# EAGLE board HRM (EAGLE 7.0.0)
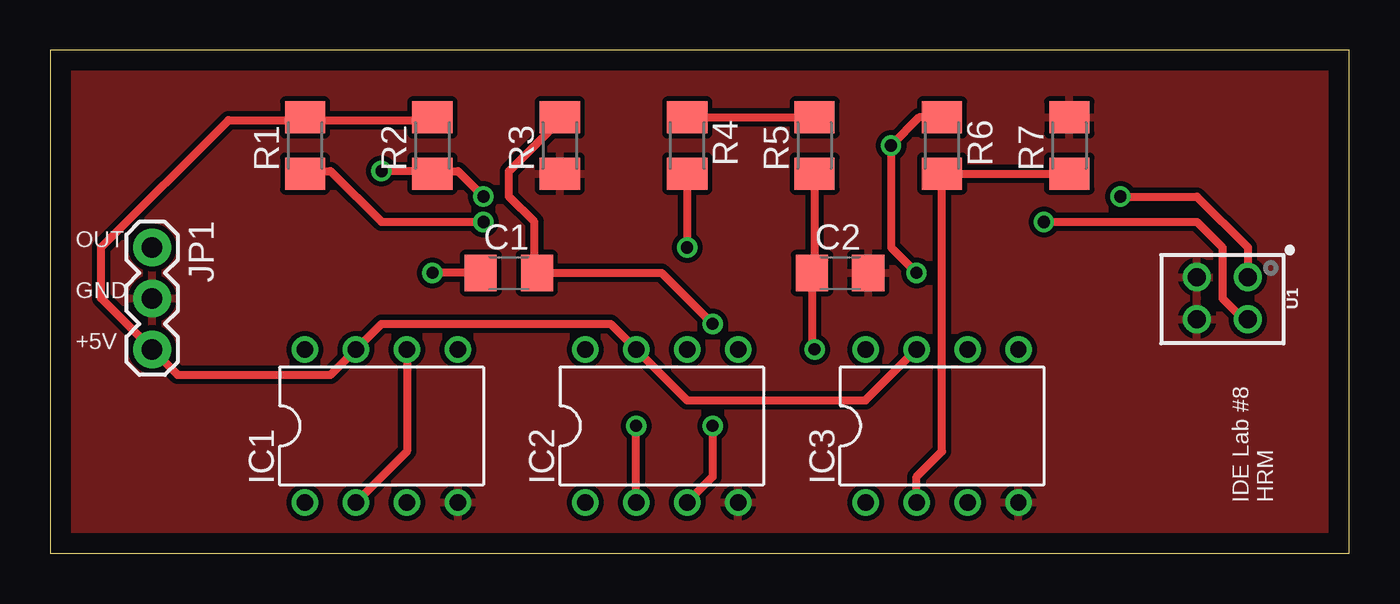
[diagram p0: board, top side]
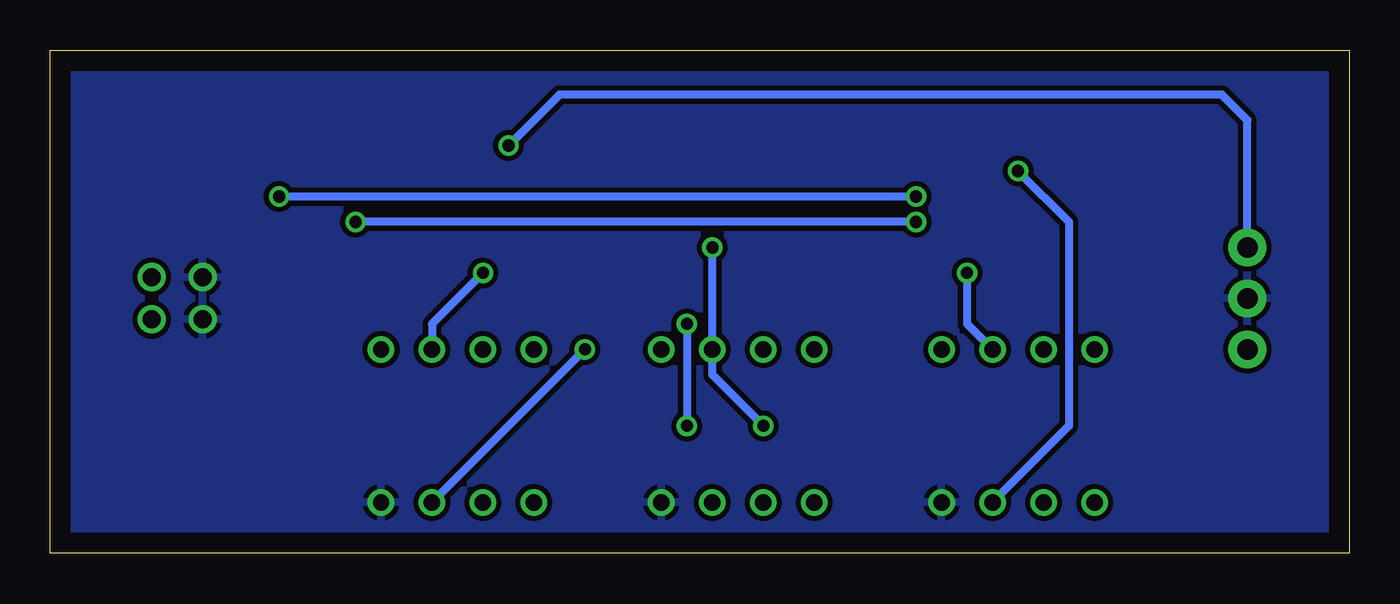
[diagram p1: board, bottom side, seen from below]

Size 64.75 x 25.07 mm. Coordinates in mm from the lower left corner, seen from the top.
Outline: 0,0 64.75,0 64.75,25.07 0,25.07 0,0
Copper layers (1*16): Top 0.035mm / dielectric 1.5mm / Bottom 0.035mm
Design rules "default": minimum track width 6mil, minimum drill 0.35mm, track to track 6mil, track to pad 6mil, pad to pad 6mil, via to via 6mil, smd to smd 6mil, copper to edge 40mil, drill to drill 6mil, minimum pad ring 10mil, minimum via ring 8mil, stop-mask expansion 4mil, vias tented up to drill 0mil, thermal gap 10mil
Net classes: 0 default: width 0.305 mm, drill 0.508 mm, clearance 0.254 mm

## Footprints (pad centres in the part's own frame; a part is rotated, then mirrored left to right if it is on the bottom)
C3216 = smd 1.6 x 1.8: 1 -1.4,0; 2 1.4,0
DIL08 = drill 0.813 pad 1.27: 1 -3.81,-3.81; 2 -1.27,-3.81; 3 1.27,-3.81; 4 3.81,-3.81; 5 3.81,3.81; 6 1.27,3.81; 7 -1.27,3.81; 8 -3.81,3.81
1X03 = drill 1.016 pad 1.88: 1 0,0; 2 2.54,0; 3 5.08,0
M1206 = smd 1.6 x 2: 1 -1.4,0; 2 1.4,0
QRD1114 = drill 0.9: 1 -1.067,1.27; 2 -1.067,-1.27; 3 1.041,-1.27; 4 1.041,1.27

## Placement (x,y rotation side)
C1  3.48uF  [C3216]  22.86,13.97 0 top
C2  1uF  [C3216]  39.37,13.97 0 top
IC1  UA741P  [DIL08]  16.51,6.35 0 top
IC2  UA741P  [DIL08]  30.48,6.35 0 top
IC3  UA741P  [DIL08]  44.45,6.35 0 top
JP1  [1X03]  5.08,15.24 270 top
R1  65  [M1206]  12.7,20.32 90 top
R2  10k  [M1206]  19.05,20.32 90 top
R3  57.3k  [M1206]  25.4,20.32 90 top
R4  8.1k  [M1206]  31.75,20.32 270 top
R5  8.14k  [M1206]  38.1,20.32 90 top
R6  98k  [M1206]  44.45,20.32 270 top
R7  0.981k  [M1206]  50.8,20.32 90 top
U1  QRD1114  [QRD1114]  58.42,12.7 270 top

## Library data of the parts
C1 C2 R1-R7 = resistor
IC1-IC3 = linear
JP1 = SparkFun-Connectors
U1 = SparkFun-Sensors; PROD_ID: IC-09032; SF_ID: SEN-00246

## Nets
+5V: IC1.7 IC2.7 IC3.7 JP1.3 R1.2 R2.2
GND: C2.2 IC1.4 IC2.4 IC3.4 JP1.2 R3.1 R7.2 U1.2 U1.3
N$1: R1.1 U1.4
N$2: IC1.3 R2.1 U1.1
N$3: IC2.2 IC2.6 R4.2
N$4: C1.1 IC1.2 IC1.6
N$5: C1.2 IC2.3 R3.2
N$6: R4.1 R5.2
N$7: C2.1 IC3.3 R5.1
N$8: IC3.2 R6.2 R7.1
OUT: IC3.6 JP1.1 R6.1

## Tracks (layer width: path | path; a pad name or v marks a point on that pad's centre or on a via)
+5V
  Top 0.406: 12.7,21.59 8.89,21.59 2.54,15.24 2.54,12.7 JP1.3 6.35,8.89 13.97,8.89 IC1.7 16.51,11.43 27.94,11.43 IC2.7 31.75,7.62 40.64,7.62 IC3.7 | 12.7,21.59 19.05,21.59 R2.2 | 12.7,21.59 R1.2
GND
  pour Bottom: 0,25.4 0,0 64.77,0 64.77,25.4
  pour Top: 0,25.4 64.77,25.4 64.77,0 0,0
N$1  (via drill 0.6)
  Top 0.406: R1.1 12.7,19.05 13.97,19.05 16.51,16.51 v21.59,16.51 | v49.53,16.51 57.15,16.51 58.42,15.24 58.42,12.7 59.69,11.43 U1.4
  Bottom 0.406: v21.59,16.51 v49.53,16.51
N$2  (via drill 0.6)
  Top 0.406: 19.05,19.05 v16.51,19.05 | U1.1 59.69,15.24 57.15,17.78 v53.34,17.78 | v21.59,17.78 20.32,19.05 19.05,19.05 | 19.05,19.05 R2.1
  Bottom 0.406: v16.51,19.05 13.97,16.51 13.97,6.35 IC1.3 | v21.59,17.78 v53.34,17.78
N$3  (via drill 0.6)
  Top 0.406: IC2.2 v29.21,6.35 | R4.2 v31.75,15.24
  Bottom 0.406: v29.21,6.35 31.75,8.89 IC2.6 v31.75,15.24
N$4  (via drill 0.6)
  Top 0.406: C1.1 v19.05,13.97 | IC1.6 17.78,5.08 IC1.2
  Bottom 0.406: v19.05,13.97 19.05,11.43 IC1.6
N$5  (via drill 0.6)
  Top 0.406: R3.2 25.4,21.59 22.86,19.05 22.86,17.78 24.13,16.51 24.13,13.97 C1.2 30.48,13.97 v33.02,11.43 | v33.02,6.35 33.02,3.81 IC2.3
  Bottom 0.406: v33.02,11.43 v33.02,6.35
N$6
  Top 0.406: R4.1 R5.2
N$7  (via drill 0.6)
  Top 0.406: R5.1 38.1,14.1 C2.1 37.97,10.29 v38.1,10.16
  Bottom 0.406: v38.1,10.16 IC3.3
N$8
  Top 0.406: IC3.2 43.18,3.81 44.45,5.08 R6.2 R7.1
OUT  (via drill 0.6)
  Top 0.406: R6.1 43.31,21.72 v41.91,20.32 41.91,15.24 v43.18,13.97
  Bottom 0.406: v43.18,13.97 45.72,11.43 IC3.6 | JP1.1 5.08,21.59 6.35,22.86 39.37,22.86 v41.91,20.32

## Text on the board
tPlace: OUT | GND | +5V | IDE Lab #8 / HRM